# Altium PCB PCB1.PcbDoc
Units mil, origin at the board's own origin, x right, y up, seen from the top; angles counter-clockwise.
Board outline 2700 x 2100 mil, 2 copper layers (Top Layer, Bottom Layer), stack 62.8 mil thick; 15 components, 33 nets, 62 pads, 16 vias.
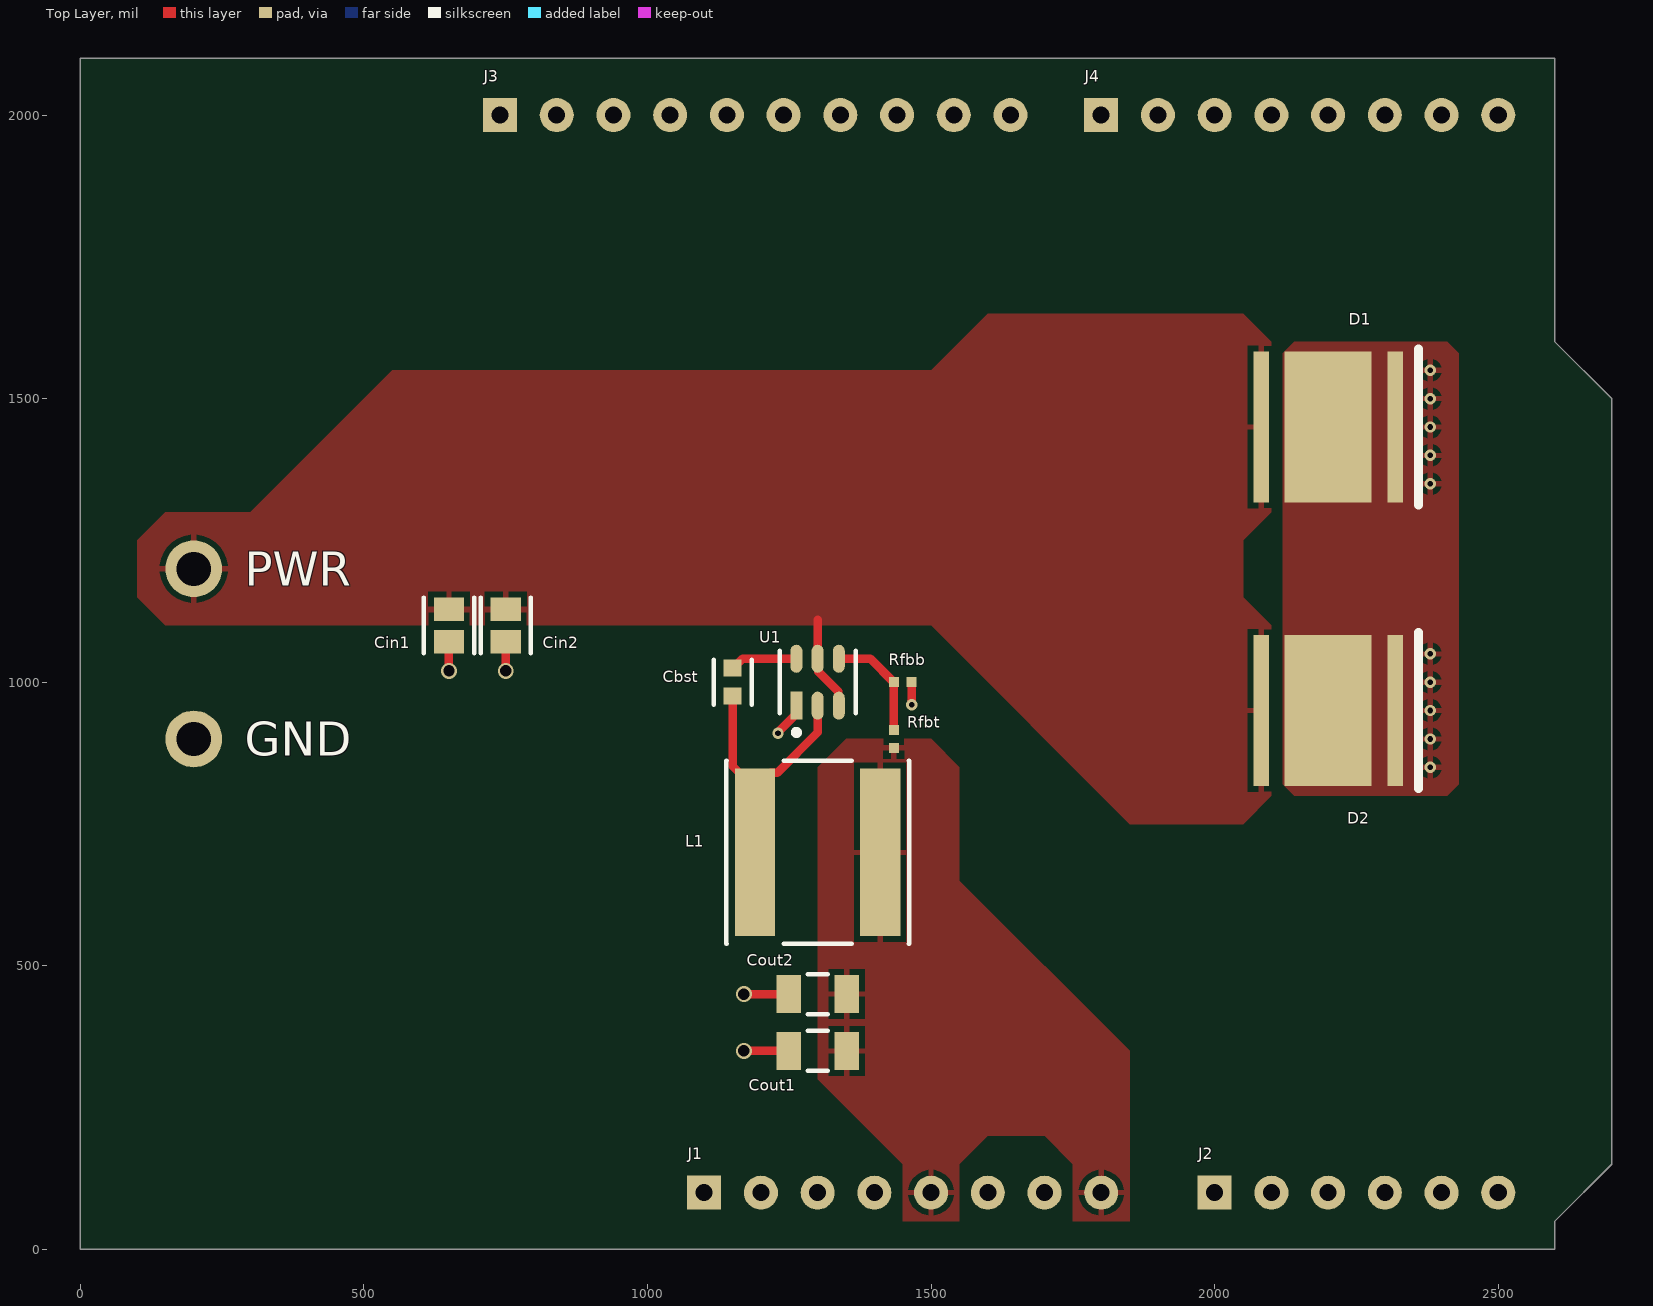
[diagram p0: Top Layer view]
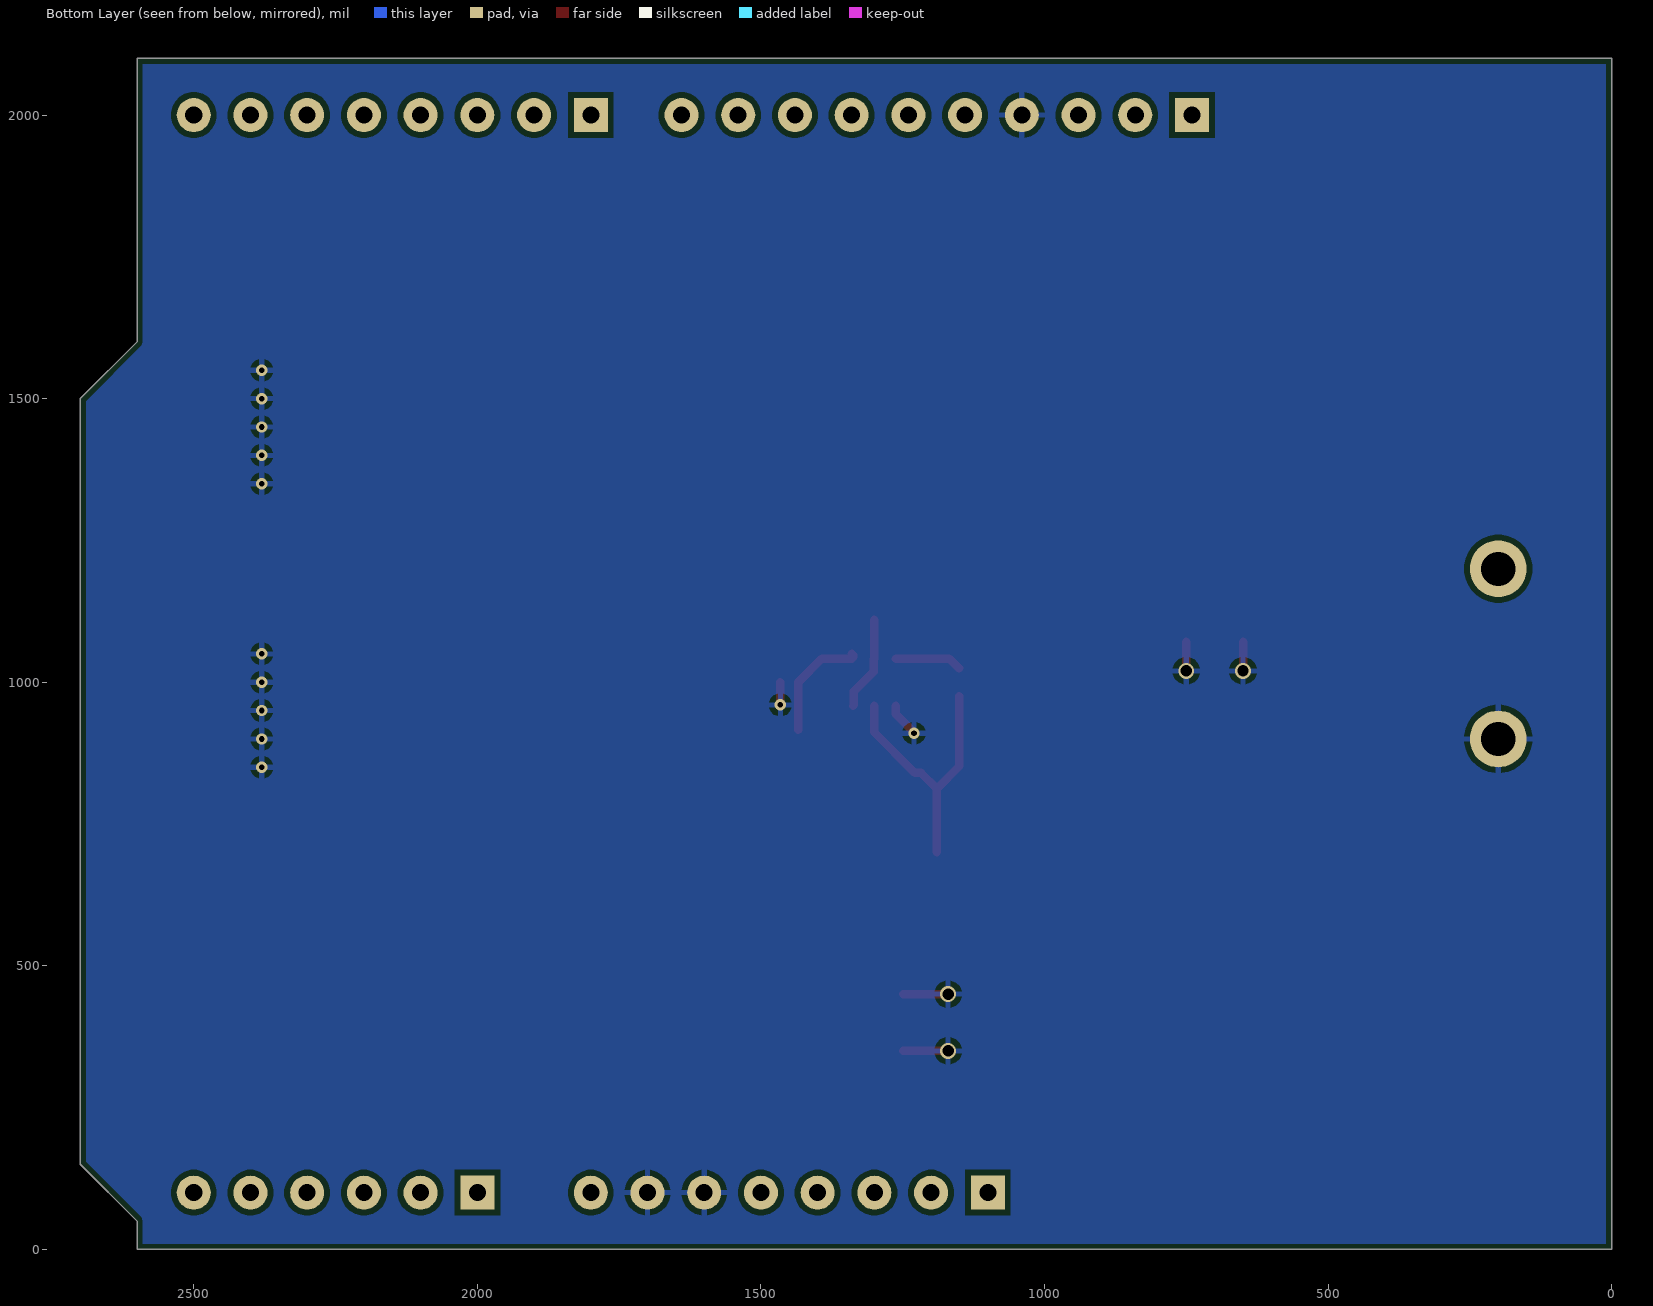
[diagram p1: Bottom Layer view, seen from below]
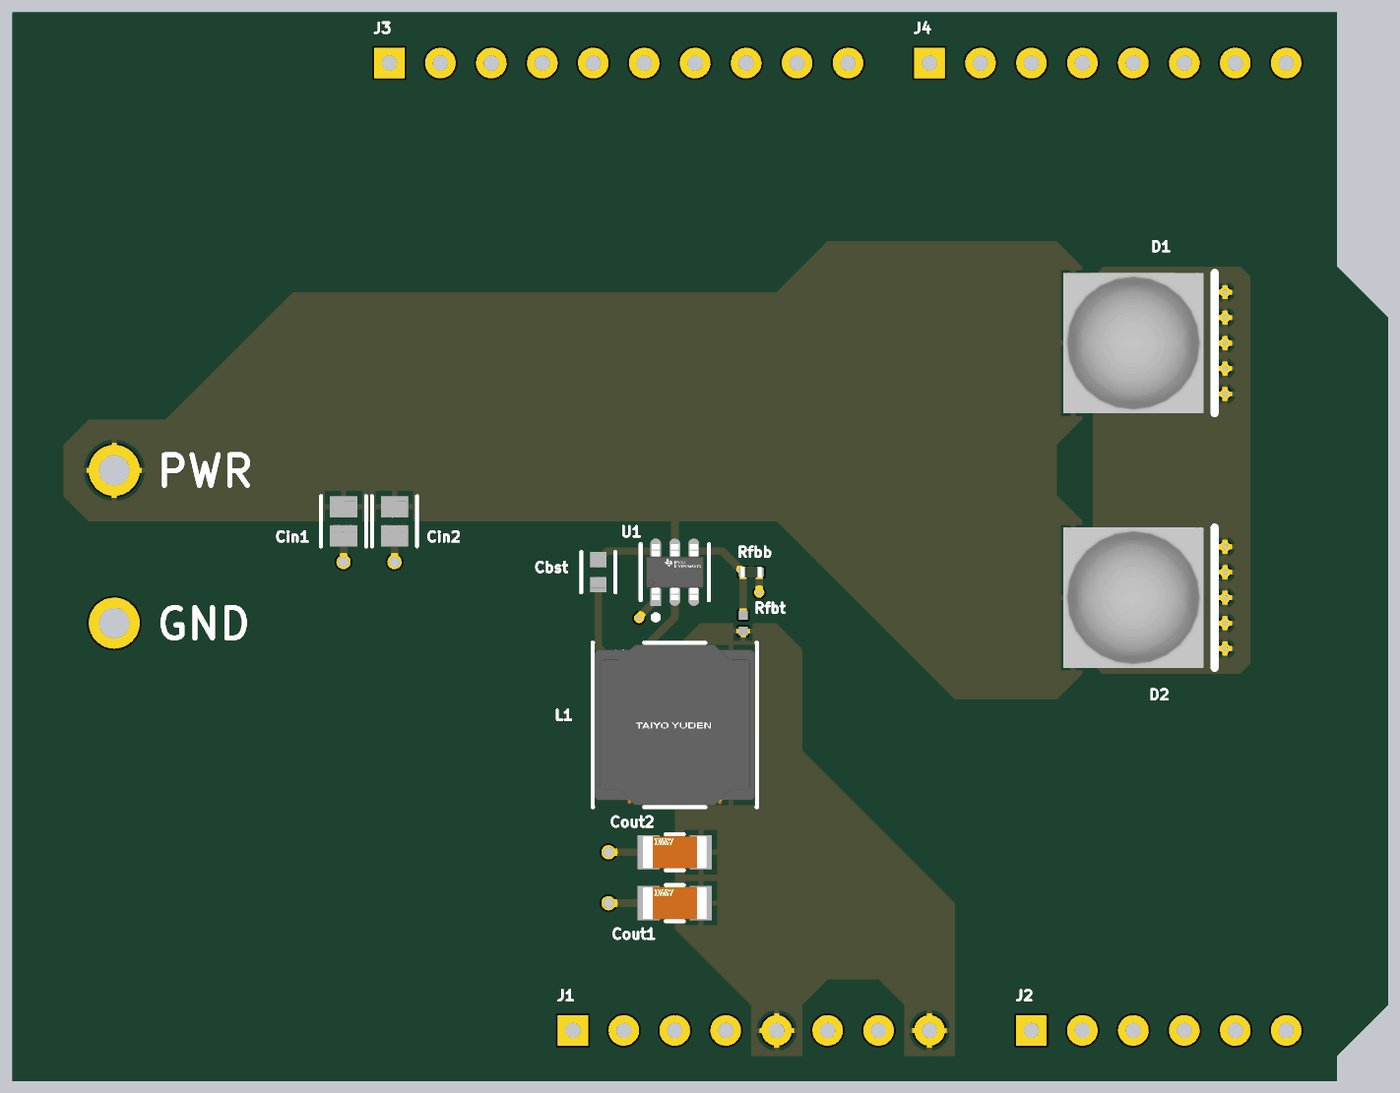
[diagram p2: 3D render of the assembled board from above, using the file's embedded part models]

## Layer stack, top to bottom
Top Solder: solder mask 0.4, Solder Resist, Dk 3.5
Top Layer: signal copper 1.4
Dielectric 1: dielectric 60, FR-4, Dk 4.8
Bottom Layer: signal copper 1.4
Bottom Solder: solder mask 0.4, Solder Resist, Dk 3.5

## Board outline
0,0 2600,0 2600,50 2700,150 2700,1500 2600,1600 2600,2100 0,2100

## Design rules (kind name [scope] priority, off if disabled: settings)
BoardOutlineClearance [All] p1: gap=10 ignorepadtopadclearanceinfootprint=FALSE
Clearance [All] p1: gap=10 ignorepadtopadclearanceinfootprint=FALSE except(0: Arc-Hole Track-Hole SMDPad-Hole THPad-Hole Via-Hole Fill-Hole Poly-Hole Region-Hole Text-Hole)
MinimumSolderMaskSliver [All] p1: minsoldermaskwidth=5
PolygonConnect [All] p1: connectstyle=Relief reliefconductorwidth=10 reliefentries=4 polygonreliefangle="90 Angle" airgapwidth=10
RoutingVias [All] p1: holewidth=10 width=18 viastyle="Through Hole" minholewidth=6 minwidth=14 maxholewidth=28 maxwidth=50
SilkToSolderMaskClearance [IsPad] p1: minsilkscreentomaskgap=5 clearancetoexposedcopper=TRUE
SolderMaskExpansion [All] p1: expansion=4 istentingtop=FALSE
Width [All] p1: maxlimit=30 minlimit=5 preferedwidth=15
28 further rules are at their usual default settings.

## Components (designator, comment, footprint, x,y, rotation, side; value= is the part's Value field where it differs from the comment)
Cbst "CL10B104KA8NFNC" FP-CL10-IPC_C 1150,1000 r90 top
Cin1 "CL21A106MPFNNNF" FP-CL21-IPC_C 650,1100 r270 top
Cin2 "CL21A106MPFNNNF" FP-CL21-IPC_C 750,1100 r270 top
Cout1 "12066D226MAT2A" FP-1206-L_3_2_0_2-W_1_6_0-IPC_C 1300,350 r180 top
Cout2 "12066D226MAT2A" FP-1206-L_3_2_0_2-W_1_6_0-IPC_C 1300,450 r180 top
D1 "MKRAWT-00-0000-0D0BJ20E5" CREE-MK-R-2_V 2200,1450 r0 top
D2 "MKRAWT-00-0000-0D0BJ20E5" CREE-MK-R-2_V 2200,950 r0 top
J1 "8-pin-header" 8-pin-header-Footprint-1 1450,100 r0 top
J2 "6-pin-header" 6-pin-header-Footprint-1 2250,100 r0 top
J3 "10-pin-header" 10-pin-header-Footprint-1 1190,2000 r0 top
J4 "8-pin-header" 8-pin-header-Footprint-1 2150,2000 r0 top
L1 "NRS8030T3R3MJGJ" FP-NRS8030-MFG 1300,700 r0 top
Rfbb "ERJ2RKF1002X" RESC1005X40X25LL05T05 1450,1000 r180 top
Rfbt "ERJ-2RKF5622X" RESC1005X40X25LL05T05 1434.25,900 r270 top
U1 "TPS562201DDCR" FP-DDC0006A-IPC_C 1300,1000 r90 top

## Footprints (in the part's own frame and the unit in brackets; to place one, negate y for a bottom-side part, rotate by r counter-clockwise, add the part's x,y. Pads: shape width x height; smd on the part's side, far side on the other; paste and mask are expansions set on the pad)
6-pin-header-Footprint-1 [mil]
  rect 60x60 hole 30: 1(-250,0)
  round 60 hole 30: 2(-150,0) 3(-50,0) 4(50,0) 5(150,0) 6(250,0)
8-pin-header-Footprint-1 [mil]
  rect 60x60 hole 30: 1(-350,0)
  round 60 hole 30: 2(-250,0) 3(-150,0) 4(-50,0) 5(50,0) 6(150,0) 7(250,0) 8(350,0)
10-pin-header-Footprint-1 [mil]
  rect 60x60 hole 30: 1(-450,0)
  round 60 hole 30: 2(-350,0) 3(-250,0) 4(-150,0) 5(-50,0) 6(50,0) 7(150,0) 8(250,0) 9(350,0) 10(450,0)
CREE-MK-R-2_V [mm] "SMD, 2-Leads, Body 7x7mm, Thermal Pad 3.9x6.76mm"
  rect 0.7x6.76 smd: 1(-3,0) 2(3,0)
  rect 3.9x6.76 smd: 3(0,0)
  silkscreen extent 4.05,-3.5 4.05,3.5, body extent -3.5,-3.5 3.5,3.5, height 4.1
FP-1206-L_3_2_0_2-W_1_6_0-IPC_C [mil]
  rect 43.49x67.17 smd paste+0 mask+0: 1(-51.21,0) 2(51.21,0)
  silkscreen extent -18,-35 18,35, body extent -77,-39 77,39, height 10
FP-CL10-IPC_C [mil]
  rect 29.85x31.97 smd paste+0 mask+0: 1(-24.68,0) 2(24.68,0)
  silkscreen extent -40,-33 40,33, body extent -44,-22 44,22, height 10
FP-CL21-IPC_C [mil]
  rect 41.52x53.39 smd paste+0 mask+0: 1(-28.57,0) 2(28.57,0)
  silkscreen extent -49,-44 49,44, body extent -53,-32 53,32, height 10
FP-DDC0006A-IPC_C [mm]
  rect 1.254x0.532 smd paste+0 mask+0: 1(-1.05,0.95)
  rrect100% 1.254x0.532 smd paste+0 mask+0: 2(-1.05,0) 3(-1.05,-0.95) 4(1.05,-0.95) 5(1.05,0) 6(1.05,0.95)
  silkscreen extent -2.37,-1.7 1.4,1.7, body extent -1.78,-1.55 1.78,1.55, height 0.25
FP-NRS8030-MFG [mm]
  rect 1.8x7.5 smd paste+0 mask+0: 1(-2.8,0) 2(2.8,0)
  silkscreen extent -4.1,-4.1 4.1,4.1, body extent -4.2,-4.2 4.2,4.2, height 0.25
RESC1005X40X25LL05T05 [mm] "Chip Resistor, 2-Leads, Body 1.05x0.55mm, IPC High Density"
  rect 0.45x0.45 smd: 1(-0.4,0) 2(0.4,0)
  body extent -0.53,-0.28 0.53,0.28, height 0.4

## Part data
Cbst: library part CMP-13271-001423-1, "Cap Ceramic 100nF 25V X7R ±10% Pad SMD 0603 +125°C T/R", Capacitance=100nF, Case Code (Imperial)=0603, Case Code (Metric)=1608, Dielectric=X7R, Max Operating Temperature=125°C, Min Operating Temperature=-55°C, Tolerance=10%, Voltage Rating=25V, Case/Package=0603, Depth=0.8mm, Height=0.8mm, Length=1.6mm, Mount="Surface Mount", Packaging="Tape and Reel", Radiation Hardening=No, Thickness=0.035inch, Width=0.031inch
Cin1 Cin2: library part CMP-13271-002245-1, "CL21 Series 0805 10uF 10V ±20% Tolerance X5R Multilayer Ceramic Chip Capacitor", Capacitance=10uF, Case/Package=0805, Dielectric=X5R, Max Operating Temperature=85°C, Min Operating Temperature=-55°C, Package Quantity=10000, Tolerance=20%, Voltage Rating=10V, Depth=1.25mm, Height=1.25mm, Length=2mm, Mount="Surface Mount", Packaging="Tape and Reel", Radiation Hardening=No, Thickness=0.053inch, Voltage Rating (DC)=10V, Width=0.049inch
Cout1 Cout2: library part CMP-2000-05869-2, "General Purpose Ceramic Capacitor, 1206, 22uF, 20%, X5R, 15%, 6.3V", Capacitance=22uF, Case Code (Imperial)=1206, Case Code (Metric)=3216, Dielectric=X5R, Max Operating Temperature=85°C, Min Operating Temperature=-55°C, Package Quantity=1, Tolerance=20%, Voltage=6.3V, Case/Package=1206, Construction=Flat, Contact Plating=Tin, Depth=1.6mm, Height=0.07mm, Lead Free="Lead Free", Length=3.2mm, Mount="Surface Mount", Number of Pins=2, Packaging="Tape and Reel", Radiation Hardening=No, REACH SVHC="No SVHC", RoHS Compliant=Yes, Series=-, Termination=SMD/SMT, Thickness=0.07inch, Voltage Rating=6.3V, Voltage Rating (DC)=6.3V, Width=0.063inch
D1: library part CMP-2100-01063-1, "LED, White, 12 V, 2-Pin SMD, RoHS, Tape and Reel"
D2: library part CMP-2100-01063-1, "LED, White, 12 V, 2-Pin SMD, RoHS, Tape and Reel", Case/Package=TSSOP, Frequency=650kHz, Manufacturer="Texas Instruments", Manufacturer Part Number=TPS562200DDCR, Max Operating Temperature=85°C, Max Output current=4.3A, Max Supply Voltage=17V, Min Input Voltage=4.5V, Min Operating Temperature=-40°C, Nominal Supply Voltage=12V, Package Body Material=Plastic, Package Shape=Rectangular, Package Style="SMALL OUTLINE, THIN PROFILE, SHRINK PITCHMeter", Peak Reflow Temperature (Cel)=260°C, Supplier Part Number=595-TPS562200DDCR, Temperature Grade=INDUSTRIAL, Category="Voltage Regulators - Switching", Channels=1, ComponentLink1Description=https://www.ti.com:443/lit/ds/symlink/tps562200.pdf?src-supplier=IHS+Markit, ComponentLink1URL=https://www.ti.com:443/lit/ds/symlink/tps562200.pdf?src-supplier=IHS+Markit, ComponentLink2Description=https://datasheet.ciiva.com/29736/tps562200-29736871.pdf?src-supplier=Digi-Key, ComponentLink2URL=https://datasheet.ciiva.com/29736/tps562200-29736871.pdf?src-supplier=Digi-Key, Control Technique="PULSE WIDTH MODULATION", Height - Seated (Max)=1.1mm, JESD-30 Code=R-PDSO-G6, JESD-609 Code=e3, Length=2.9mm, Moisture Sensitivity Level=1, Pins=6, Pricing="1=0.81, 10=0.668, 50=0.668, 100=0.506, 1000=0.345, 10000=0.279 (USD)", Reach SVHC Compliant=Yes, RoHS=Yes, RoHS Compliant=Yes, Stock=26476, Supplier=Mouser, Surface Mount=Yes, Switcher Configuration=BUCK, Terminal Finish=Tin, Terminal Form="Gull Wing", Terminal Pitch=0.95mm, Terminal Position=DUAL, Throw Configuration="SWITCHING REGULATOR", Width=1.6mm
J1 J4: library part CMP-002-00072-1, "8 pin header for arduino"
J2: library part CMP-002-00071-2, "1x6 pin header for arduino"
J3: library part CMP-002-00073-1, "10 pin header for arduino"
L1: library part CMP-14484-000405-1, "Inductor Power Shielded Wirewound 3.3uH 20% 100KHz Ferrite 4.2A 24.7mΩ DCR T/R", Case/Package=Nonstandard, Current Rating=4.3A, DC Resistance (DCR)=19mR, Inductance=3.3uH, Inductance Tolerance=20%, Max DC Current=4.2A, Max Operating Temperature=125°C, Min Operating Temperature=-25°C, Package Quantity=1000, Resistor Type=Wirewound, Self Resonant Frequency=50MHz, Test Frequency=100kHz, Core Material=Ferrite, Depth=8.2mm, Halogen Free="Halogen Free", Height=3mm, Height - Seated (Max)=0.118inch, Lead Free="Lead Free", Lead Pitch=5.6mm, Length=8mm, Mount="Surface Mount", Number of Pins=2, Packaging="Tape and Reel", Radiation Hardening=No, REACH SVHC="No SVHC", RMS Current (Irms)=4.3A, RoHS Compliant=Yes, Saturation Current=4.2A, Series=NRS, Shielding=Shielded, Termination=SMD/SMT, Tolerance=20%, Width=0.315inch
Rfbb: library part CMP-2000-07588-1, "Chip Resistor, 10 KOhm, +/- 1%, 0.1 W, -55 to 155 degC, 0402 (1005 Metric), RoHS, Tape and Reel", Case Code (Imperial)=0402, Case Code (Metric)=1005, Manufacturer=Panasonic, Max Operating Temperature=155degC, Max Power Dissipation=100mW, Min Operating Temperature=-55degC, Package Description="2-Pin Surface Mount Device, Body 1 x 0.5 mm", Package Quantity=1, Package Reference=402, Resistance=10KOhm, Temperature Coefficient=100ppm\/degreesC, Tolerance=1%, Voltage Rating=50V, Case\/Package=0402, Composition=ThickFilm, Contact Plating=Tin, Datasheet URL=https://industrial.panasonic.com/cdbs/www-data/pdf/RDA0000/AOA0000C304.pdf, Datasheet Version=02/2017, Depth=0.5mm, Height=0.35mm, Lead Free=LeadFree, Length=1mm, Manufacturer URL=http://www.panasonic.com/, Military Standard=Not, Mount=SurfaceMount, Mounting Technology=SurfaceMount, Number of Pins=2, Number of Terminations=2, Packaging=TapeandReel, Power Rating=100mW, Radiation Hardening=No, REACH SVHC=NoSVHC, RoHSCompliant=True, Termination=SMD/SMT, Voltage Rating (DC)=50V, Width=0.02inch
Rfbt: library part CMP-2002-00996-1, Manufacturer=Panasonic, Part Number=ERJ-2RKF5622X
U1: library part CMP-04918-000361-1, "IC REG BUCK ADJ 2A TSOT23-6", Case/Package=SOT, Max Input Voltage=17V, Max Operating Temperature=125°C, Max Output current=2A, Min Input Voltage=4.5V, Min Operating Temperature=-40°C, Output Voltage=7V, Quiescent Current=400uA, Switching Frequency=580kHz, Contact Plating=Tin, Lead Free="Lead Free", Mount="Surface Mount", Number of Outputs=1, Number of Pins=6, Operating Supply Voltage=17V, Output Type=Adjustable, RoHS Compliant=Yes

## Free pads (board coordinates)
  round 100 hole 60: 5(200,1200) 6(200,900)

## Via types
v1: diameter 20, hole 10, Top Layer to Bottom Layer, 12 vias
v2: diameter 28, hole 20, Top Layer to Bottom Layer, 4 vias

## Nets (pads, with @x,y where several pads share a name; then routed paths per layer and width w, separated by ;. In a path a pad name is that pad's centre, name@x,y a point inside that pad or via, vN(x,y) a via of type N, cw(c..) or ccw(c..) an arc to the next point about the centre after c; other vN are vias at no path point)
+3.3V: J1.4
+5: Cout1.1 Cout2.1 J1.5 J1.8 L1.2 Rfbt.2
+12: Cin1.1 Cin2.1 D1.1 D2.1 pad.5 U1.3 U1.5 | length 166.8
  Top Layer w15: 1300,1110 U1.5 1301.14,1040.21 1301.14,1018.86 1336.26,983.74 1336.26,959.79 U1.3
A0: J2.1
A1: J2.2
A2: J2.3
A3: J2.4
A4: J2.5
A5: J2.6
AREF: J3.3
D0: J4.8
D1: J4.7
D2: J4.6
D3: J4.5
D4: J4.4
D5: J4.3
D6: J4.2
D7: J4.1
D8: J3.10
D9: J3.9
D10: J3.8
D11: J3.7
D12: J3.6
D13: J3.5
D18: J3.2
D19: J3.1
GND: Cin1.2 Cin2.2 Cout1.2 Cout2.2 D1.2 D1.3 D2.2 D2.3 J1.6 J1.7 J3.4 pad.6 Rfbb.1 U1.1 | length 364.5
  Top Layer w15: v2(650,1020) Cin1.2 ; v2(750,1020) Cin2.2 ; v2(1170,350) Cout1.2 ; v2(1170,450) Cout2.2 ; v1(1230,910) 1230.96,910.96 1230.96,912.79 1262.6,944.43 U1.1 ; v1(1465.75,960) Rfbb.1 ; J1.7@1698.09,100 J1.7
  other v1: 2380,850 2380,900 2380,950 2380,1000 2380,1050 2380,1350 2380,1400 2380,1450 2380,1500 2380,1550
IOREF: J1.2
N-C: J1.1
NetCbst_2: Cbst.2 U1.6 | length 119.5
  Top Layer w15: Cbst.2 1151.06,1024.68 1167.73,1041.35 U1.6
NetRfbb_2: Rfbb.2 Rfbt.1 U1.4 | length 206.4
  Top Layer w15: U1.4@1340.15,1050 1337.4,1047.25 1337.4,1044.1 1340.15,1041.35 1392.9,1041.35 Rfbb.2 Rfbt.1
RESET: J1.3
SW_OUT: Cbst.1 L1.1 U1.2 | length 490.3
  Top Layer w15: Cbst.1 1150,851.97 L1.1@1189.76,812.2 ; L1.1 L1.1@1189.76,812.2 ; U1.2 1300,911.46 1228.68,840.14 1217.7,840.14 L1.1@1189.76,812.2

## Polygon pours and split planes (outlines as drawn)
+12 on Top Layer "+12_L01_P012" (solid, pour order 12): 300,1300 550,1550 1500,1550 1600,1650 2050,1650 2100,1600 2100,1300 2050,1250 2050,1150 2100,1100 2100,800 2050,750 1850,750 1500,1100 150,1100 100,1150 100,1250 150,1300
+5 on Top Layer "+5_L01_P009" (solid, pour order 9): 1550,850 1550,650 1850,350 1850,50 1750,50 1750,150 1700,200 1600,200 1550,150 1550,50 1450,50 1450,150 1300,300 1300,850 1350,900 1500,900
GND on Top Layer "GND_L01_P002" (solid, pour order 2): 2120,1580 2120,820 2140,800 2410,800 2430,820 2430,1580 2410,1600 2140,1600
GND on Bottom Layer "GND_L02_P000" (solid, pour order 0): 0,2100 0,0 2600,0 2600,50 2700,150 2700,1500 2600,1600 2600,2100

## Silkscreen, mask and mechanical layers (free items; w line width, h text height)
Top Overlay:
  text "PWR" at 290.03,1170.01 h60
  text "GND" at 290.03,870.01 h60